# EAGLE board TSC-proiect2 (EAGLE 9.7.0)
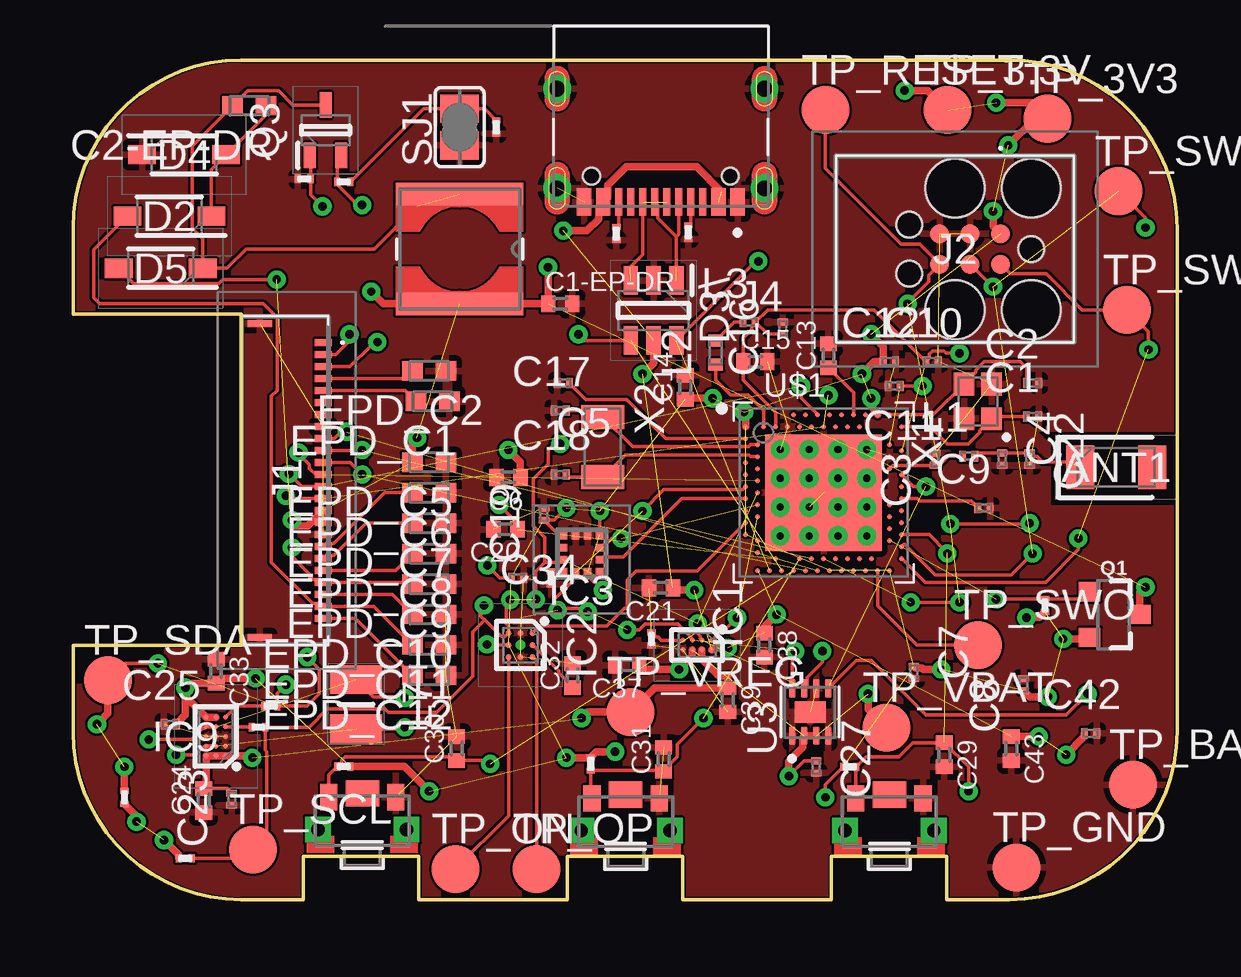
[diagram p0: board, top side]
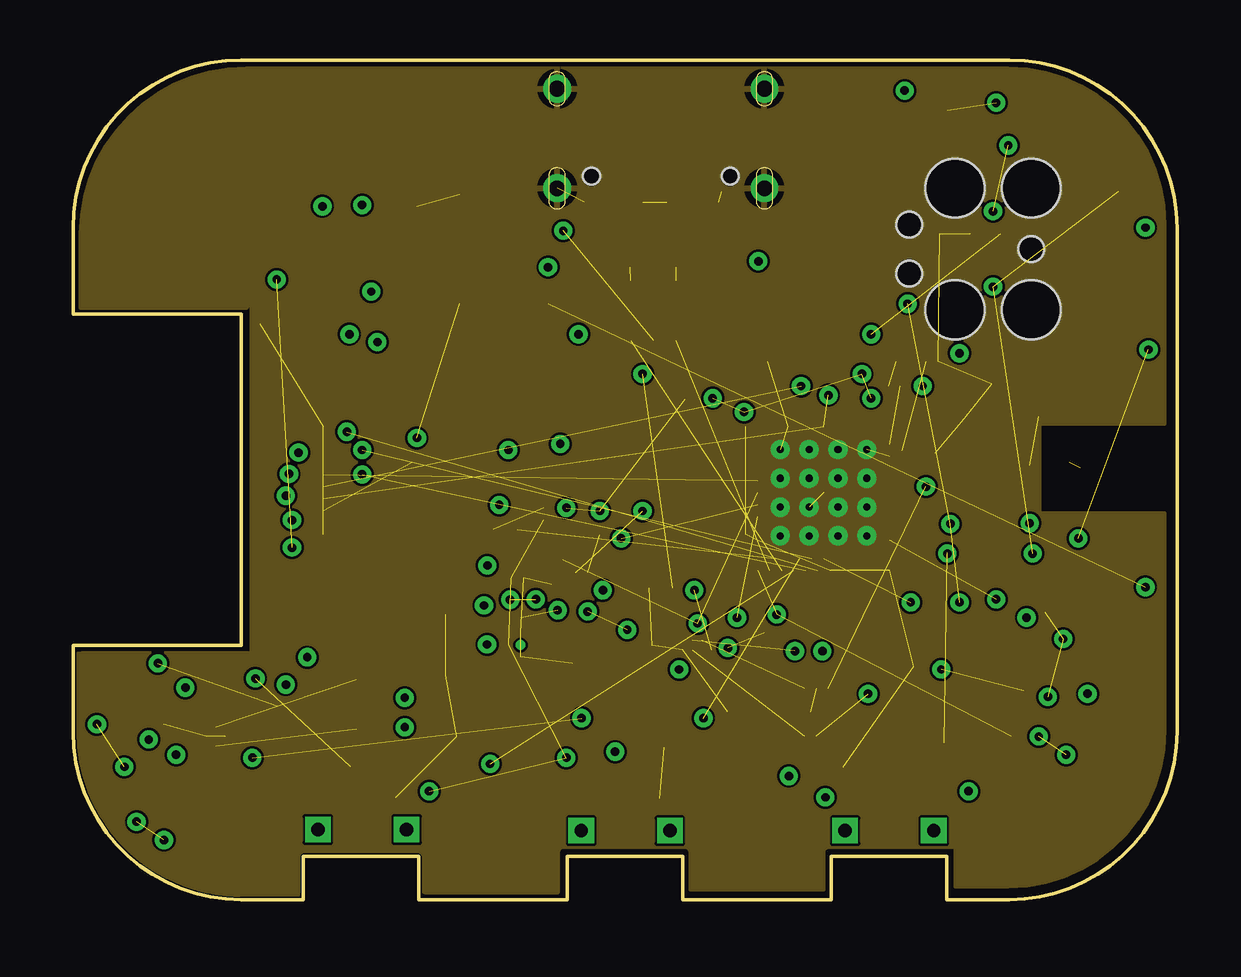
[diagram p1: board, inner layer Route2]
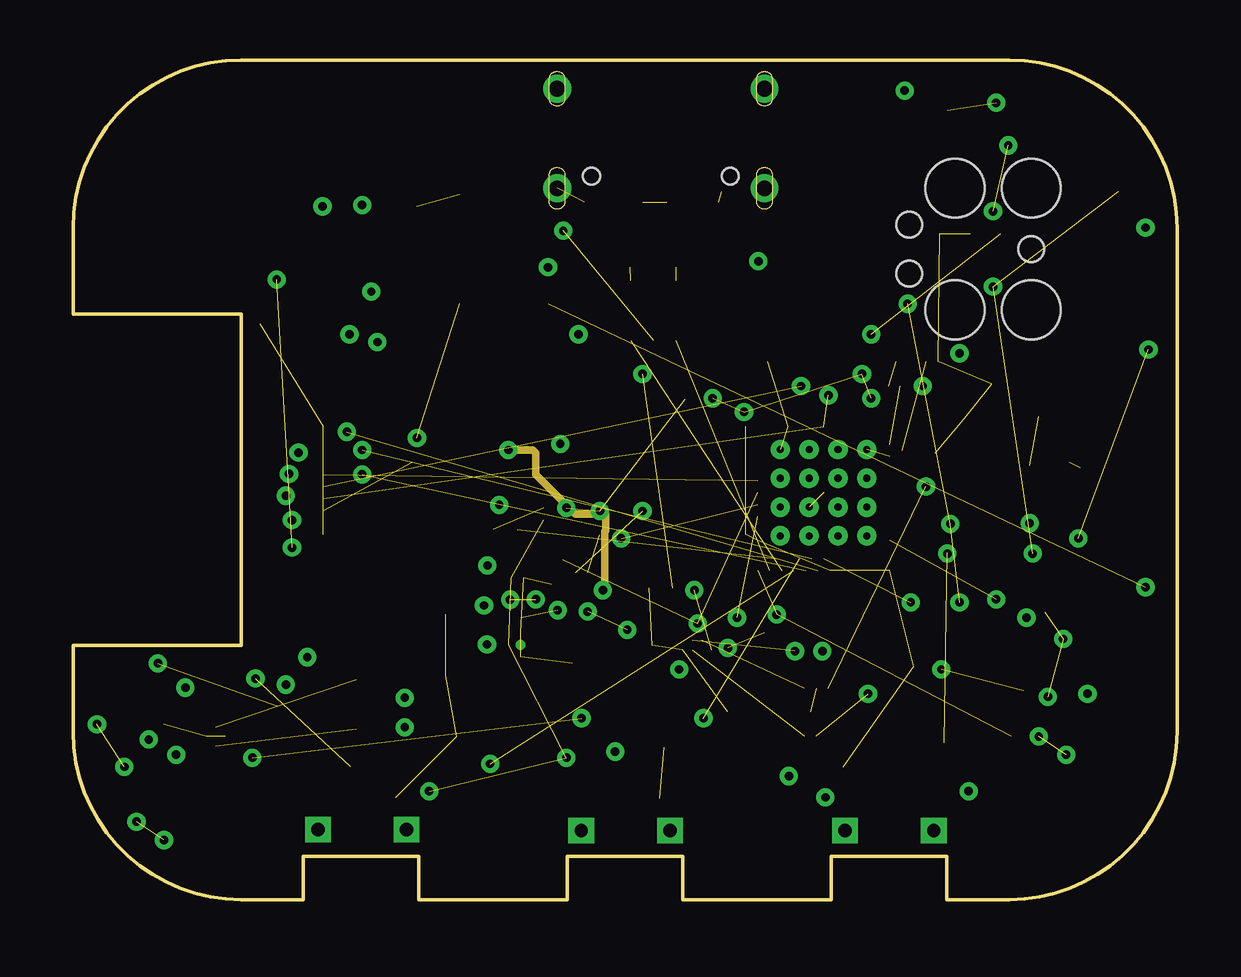
[diagram p2: board, inner layer Route15]
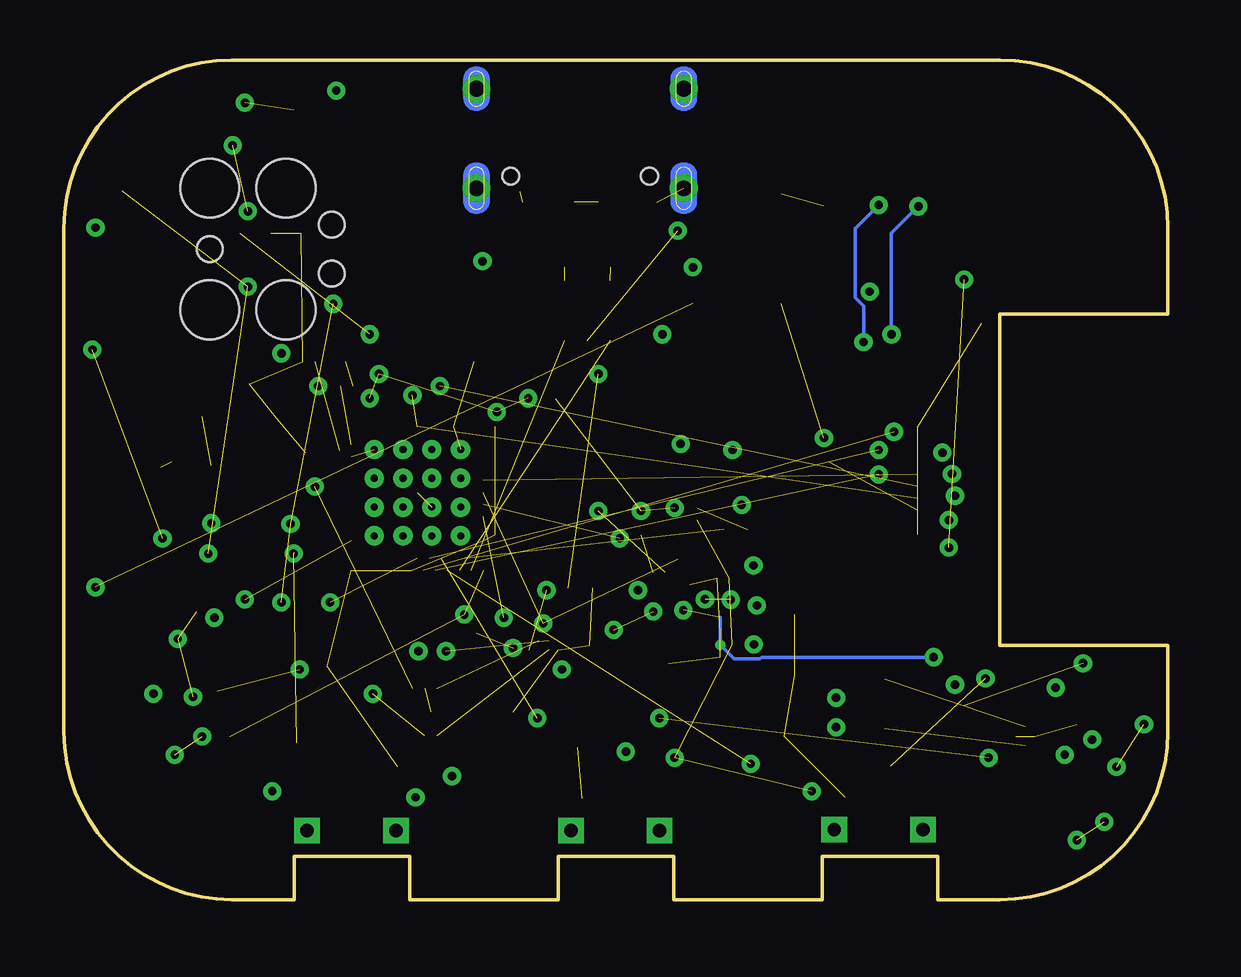
[diagram p3: board, bottom side, seen from below]

Size 46 x 35 mm. Coordinates in mm from the lower left corner, seen from the top.
Outline: 39,0 36.4,0 36.4,1.8 31.6,1.8 31.6,0 25.4,0 25.4,1.8 20.6,1.8 20.6,0 14.4,0 14.4,1.8 9.6,1.8 9.6,0 7,0 arc-90 0,7 0,10.6 7,10.6 7,24.4 0,24.4 0,28 arc-90 7,35 39,35 arc-90 46,28 46,7 arc-90 39,0
Copper layers (1+2*15+16): Top 0.035mm / dielectric 1.5mm / Route2 0.035mm / dielectric 0.15mm / Route15 0.035mm / dielectric 0.2mm / Bottom 0.035mm
Design rules "Fusion Electronics Design Rules *": minimum track width 4mil, minimum drill 0.29971875mm, track to track 4mil, track to pad 4mil, pad to pad 4mil, via to via 4mil, smd to smd 4mil, copper to edge 2mil, drill to drill 6mil, minimum pad ring 10mil, minimum via ring 8mil, stop-mask expansion 4mil, vias tented up to drill 9999mil, thermal gap 10mil

## Footprints (pad centres in the part's own frame; a part is rotated, then mirrored left to right if it is on the bottom)
2450AT18B100E_ANTC3216X140N = smd 1.15 x 1.8: 1 -1.5,0; 2 1.5,0
NORDIC_NRF_3_RESC0201_L = smd 0.28 x 0.43: 1 -0.255,0; 2 0.255,0
PERFECT_0402_0402 = smd 0.6 x 0.7: 1 -0.5,0; 2 0.5,0
NORDIC_NRF_3_RESC0603_L = smd 0.85 x 0.8: 1 -0.7,0; 2 0.7,0
ESP32_C6_LIBRARY_5_SOD3716X135N = smd 1.15 x 0.8: 1 -1.75,0; 2 1.75,0
ESP32_C6_LIBRARY_3_SOT95P280X145-6N = smd 1.2 x 0.6: 1 -1.25,0.95; 2 -1.25,0; 3 -1.25,-0.95; 4 1.25,-0.95; 5 1.25,0; 6 1.25,0.95
BQ25180YBGR_BGA8C40P2X4_100X155X50 = smd 0.2 x 0.2: A1 -0.2,0.6; A2 0.2,0.6; B1 -0.2,0.2; B2 0.2,0.2; C1 -0.2,-0.2; C2 0.2,-0.2; D1 -0.2,-0.6; D2 0.2,-0.6
DRV2605YZFR_BGA9C50P3X3_144X144X62 = smd 0.25 x 0.25: A1 -0.5,0.5; A2 0,0.5; A3 0.5,0.5; B1 -0.5,0; B2 0,0; B3 0.5,0; C1 -0.5,-0.5; C2 0,-0.5; C3 0.5,-0.5
BMA423_BMA423 = smd 0.3 x 0.35: 1 -0.75,-0.775; 2 -0.25,-0.775; 3 0.25,-0.775; 4 0.75,-0.775; 7 0.75,0.775; 8 0.25,0.775; 9 -0.25,0.775; 10 -0.75,0.775 | smd 0.35 x 0.3: 5 0.775,-0.25; 6 0.775,0.25; 11 -0.775,0.25; 12 -0.775,-0.25
RT6160AWSC_BGA15C40P3X5_140X230X60 = smd 0.216 x 0.216: A1 -0.4,0.8; A2 0,0.8; A3 0.4,0.8; B1 -0.4,0.4; B2 0,0.4; B3 0.4,0.4; C1 -0.4,0; C2 0,0; C3 0.4,0; D1 -0.4,-0.4; D2 0,-0.4; D3 0.4,-0.4; E1 -0.4,-0.8; E2 0,-0.8; E3 0.4,-0.8
503480-2400_5034802400 = smd 0.3 x 0.7: 1 -5.75,1.525; 2 -5.25,1.525; 3 -4.75,1.525; 4 -4.25,1.525; 5 -3.75,1.525; 6 -3.25,1.525; 7 -2.75,1.525; 8 -2.25,1.525; 9 -1.75,1.525; 10 -1.25,1.525; 11 -0.75,1.525; 12 -0.25,1.525; 13 0.25,1.525; 14 0.75,1.525; 15 1.25,1.525; 16 1.75,1.525; 17 2.25,1.525; 18 2.75,1.525; 19 3.25,1.525; 20 3.75,1.525; 21 4.25,1.525; 22 4.75,1.525; 23 5.25,1.525; 24 5.75,1.525 | smd 0.3 x 1: MP1 -6.54,-1.125; MP2 6.54,-1.125
TC2030-IDC_TC2030IDC = smd 0.783 x 0.783: 1 -0.953,-0.635; 2 -0.953,0.635; 3 0.317,-0.635; 4 0.317,0.635; 5 1.588,-0.635; 6 1.588,0.635 | hole 2.451: -2.223,-2.54; -2.223,2.54; 0.952,-2.54; 0.952,2.54 | hole 1.067: -2.223,0; 2.857,-1.016; 2.857,1.016
KH-TYPE-C-16P_KINGHELM_KH-TYPE-C-16P = smd 0.6 x 1.15: A1_B12 -3.2,4.725; A4_B9 -2.4,4.725; A9_B4 2.4,4.725; A12_B1 3.2,4.725 | smd 0.3 x 1.15: A5 -1.25,4.725; A6 -0.25,4.725; A7 0.25,4.725; A8 1.25,4.725; B5 1.75,4.725; B6 0.75,4.725; B7 -0.75,4.725; B8 -1.75,4.725 | drill 0.65 pad 1.05: SH1 -4.32,0; SH2 4.32,0; SH3 -4.32,4.15; SH4 4.32,4.15 | hole 0.7: -2.89,3.65; 2.89,3.65
NORDIC_NRF_2_RESC0201_L = smd 0.28 x 0.43: 1 -0.255,0; 2 0.255,0
NORDIC_NRF_2_RESC0402_L = smd 0.5 x 0.6: 1 -0.5,0; 2 0.5,0
ESP32_C6_LIBRARY_2_IND_4828-WE-TPC_WRE = smd 0.9 x 5.3: 1 -2.286,0; 2 2.286,0
MLP2016SR47MT0S1_INDC2016X100N = smd 1.2 x 2.2: 1 -1.028,0; 2 1.028,0
ESP32_C6_LIBRARY_4_ESP32_C6_LIBRARY_4_ESP32_C6_LIBRARY_4_ESP32_C6_LIBRARY_4_ESP32_WROVER_SPARKFUN-DISCRETESEMI_SOT23-3 = smd 0.8 x 0.9: 1 -0.95,-1; 2 0.95,-1; 3 0,1.1
ESP32_C6_LIBRARY_6_SOT65P210X110-3N = smd 1.05 x 0.5: 1 -1.05,0.65; 2 -1.05,-0.65; 3 1.05,0
CPF0201D7K68C1_0201 = smd 0.35 x 0.25: 1 0,0.275; 2 0,-0.275
ESP32_C6_LIBRARY_7_JUMPER_SJ = smd 1.168 x 1.6: 1 -0.762,0; 2 0.762,0
2025-10-22_07-23-44_LIBRARY_SW_EVP-AKE31A_PAN = smd 0.711 x 1.092: 1 -1.4,-0.972; 2 1.4,-0.972 | drill 0.559 pad 0.914 square: 3 -1.848,0.381; 4 1.848,0.381 | smd 1.397 x 1.092: 5 0,-1.124
HECTOR_WATCH_1_TP20R = smd 2 x 2: TP 0,0
ESP32_C6_LIBRARY_SON50P200X200X80-9N = smd 0.76 x 0.27: 1 -0.985,0.75; 2 -0.985,0.25; 3 -0.985,-0.25; 4 -0.985,-0.75; 5 0.985,-0.75; 6 0.985,-0.25; 7 0.985,0.25; 8 0.985,0.75 | smd 0.9 x 1.3: 9 0,0
NORDIC_NRF_4_AQFN50P700X700X85_HS-74N = smd 4.85 x 4.85: P$74 0,0 | drill 0.3 pad 0.6: P$75 -1.8,1.8; P$76 -0.6,1.8; P$77 0.6,1.8; P$78 1.8,1.8; P$79 -1.8,0.6; P$80 -0.6,0.6; P$81 0.6,0.6; P$82 1.8,0.6; P$83 -1.8,-0.6; P$84 -0.6,-0.6; P$85 0.6,-0.6; P$86 1.8,-0.6; P$87 -1.8,-1.8; P$88 -0.6,-1.8; P$89 0.6,-1.8; P$90 1.8,-1.8 | smd 0.2 x 0.2: P$A8 -1.25,3.25; P$A10 -0.75,3.25; P$A12 -0.25,3.25; P$A14 0.25,3.25; P$A16 0.75,3.25; P$A18 1.25,3.25; P$A20 1.75,3.25; P$A22 2.25,3.25; P$A23 2.75,3.25; P$AA24 3.25,-2.25; P$AB2 -2.75,-2.5; P$AC5 -2,-2.75; P$AC9 -1,-2.75; P$AC11 -0.5,-2.75; P$AC13 0,-2.75; P$AC15 0.5,-2.75; P$AC17 1,-2.75; P$AC19 1.5,-2.75; P$AC21 2,-2.75; P$AC24 3.25,-2.75; P$AD2 -2.75,-3.25; P$AD4 -2.25,-3.25; P$AD6 -1.75,-3.25; P$AD8 -1.25,-3.25; P$AD10 -0.75,-3.25; P$AD12 -0.25,-3.25; P$AD14 0.25,-3.25; P$AD16 0.75,-3.25; P$AD18 1.25,-3.25; P$AD20 1.75,-3.25; P$AD22 2.25,-3.25; P$AD23 2.75,-3.25; P$B1 -3.25,2.75; P$B3 -2.5,2.75; P$B5 -2,2.75; P$B7 -1.5,2.75; P$B9 -1,2.75; P$B11 -0.5,2.75; P$B13 0,2.75; P$B15 0.5,2.75; P$B17 1,2.75; P$B19 1.5,2.75; P$B24 3.25,2.75; P$C1 -3.25,2.25; P$D2 -2.75,2; P$D23 2.75,2; P$E24 3.25,1.75; P$F2 -2.75,1.5; P$F23 2.75,1.5; P$G1 -3.25,1.25; P$H2 -2.75,1; P$H23 2.75,1; P$J1 -3.25,0.75; P$J24 3.25,0.75; P$K2 -2.75,0.5; P$L1 -3.25,0.25; P$L24 3.25,0.25; P$M2 -2.75,0; P$N1 -3.25,-0.25; P$N24 3.25,-0.25; P$P2 -2.75,-0.5; P$P23 2.75,-0.5; P$R1 -3.25,-0.75; P$R24 3.25,-0.75; P$T2 -2.75,-1; P$T23 2.75,-1; P$U1 -3.25,-1.25; P$U24 3.25,-1.25; P$V23 2.75,-1.5; P$W1 -3.25,-1.75; P$W24 3.25,-1.75; P$Y2 -2.75,-2; P$Y23 2.75,-2
NORDIC_NRF_BT-XTAL_2016_N = smd 0.95 x 0.85: 1 -0.725,-0.575; 2 0.725,-0.575; 3 0.725,0.575; 4 -0.725,0.575
NORDIC_NRF_1_XTAL_3215_N = smd 1 x 1.8: 1 -1.25,0; 2 1.25,0

## Placement (x,y rotation side)
ANT1  2450AT18B100E_2450AT18B100E  [2450AT18B100E_ANTC3216X140N]  43.47,18.02 0 top
C1  12p  [NORDIC_NRF_3_RESC0201_L]  39.99,20.13 0 top
C1-EP-DR  10u  [PERFECT_0402_0402]  20.3,24.83 0 top
C2  12p  [NORDIC_NRF_3_RESC0201_L]  39.99,21.53 0 top
C2-EP-DR  4.7u/25V  [NORDIC_NRF_3_RESC0603_L]  7.35,33.09 180 top
C3  1p  [NORDIC_NRF_3_RESC0201_L]  35.92,18.36 90 top
C4  1p  [NORDIC_NRF_3_RESC0201_L]  38.72,18.36 270 top
C5  100n  [NORDIC_NRF_3_RESC0201_L]  20.43,21.53 180 top
C6  4.7u  [PERFECT_0402_0402]  18.14,17.59 180 top
C7  100n  [NORDIC_NRF_3_RESC0201_L]  35.03,9.47 270 top
C8  100n  [NORDIC_NRF_3_RESC0201_L]  39.6,8.96 90 top
C9  820p (N.C.)  [NORDIC_NRF_3_RESC0201_L]  37.95,16.33 0 top
C10  N.C.  [NORDIC_NRF_3_RESC0201_L]  35.8,22.42 0 top
C11  100p  [NORDIC_NRF_3_RESC0201_L]  34.22,21.41 180 top
C12  100n  [NORDIC_NRF_3_RESC0201_L]  34.02,22.42 0 top
C13  N.C.  [PERFECT_0402_0402]  31.48,22.67 90 top
C14  4.7u  [PERFECT_0402_0402]  25.51,21.36 90 top
C15  1u  [PERFECT_0402_0402]  28.43,22.42 0 top
C16  47n  [NORDIC_NRF_3_RESC0201_L]  29.57,23.82 90 top
C17  12p  [NORDIC_NRF_3_RESC0201_L]  20.3,20.39 0 top
C18  12p  [NORDIC_NRF_3_RESC0201_L]  20.3,17.72 0 top
C19  100n  [NORDIC_NRF_3_RESC0201_L]  19.62,16.07 90 top
C20  4.7u  [PERFECT_0402_0402]  18.02,15.44 180 top
C21  4.7u  [PERFECT_0402_0402]  24.49,12.99 180 top
C22  N.C.  [NORDIC_NRF_3_RESC0201_L]  39.86,18.36 270 top
C23  0.1u  [NORDIC_NRF_3_RESC0201_L]  6.61,4.19 90 top
C24  10u  [PERFECT_0402_0402]  5.44,4.13 90 top
C25  22u  [NORDIC_NRF_3_RESC0201_L]  4.04,7.31 0 top
C27  0.1u  [NORDIC_NRF_3_RESC0201_L]  30.97,5.53 270 top
C29  1u  [PERFECT_0402_0402]  36.3,6.04 270 top
C30  1u  [PERFECT_0402_0402]  15.98,6.29 90 top
C31  1u  [PERFECT_0402_0402]  24.61,5.84 90 top
C32  1u  [PERFECT_0402_0402]  20.81,9.34 90 top
C33  22u  [PERFECT_0402_0402]  5.96,9.52 270 top
C34  0.1u  [NORDIC_NRF_3_RESC0201_L]  18.52,13.4 0 top
C37  1u  [PERFECT_0402_0402]  23.09,9.77 180 top
C38  1u  [PERFECT_0402_0402]  28.81,10.61 270 top
C39  10u  [PERFECT_0402_0402]  27.29,8.32 270 top
C42  0.1u  [NORDIC_NRF_3_RESC0201_L]  42.4,6.93 0 top
C43  4.7u  [PERFECT_0402_0402]  39.1,6.29 270 top
D2  MBR0530  [ESP32_C6_LIBRARY_5_SOD3716X135N]  4.01,28.49 180 top
D3\  ESP32_C6_LIBRARY_3_USBLC6-2SC6Y  [ESP32_C6_LIBRARY_3_SOT95P280X145-6N]  24.19,24.56 270 top
D4  MBR0530  [ESP32_C6_LIBRARY_5_SOD3716X135N]  4.63,31.05 0 top
D5  MBR0530  [ESP32_C6_LIBRARY_5_SOD3716X135N]  3.66,26.32 180 top
EPD_C1  1u/50V  [NORDIC_NRF_3_RESC0603_L]  14.99,20.77 180 top
EPD_C2  1u/50V  [NORDIC_NRF_3_RESC0603_L]  14.84,22.04 180 top
EPD_C5  0.1u/50V  [NORDIC_NRF_3_RESC0603_L]  14.84,18.23 180 top
EPD_C6  1u/50V  [NORDIC_NRF_3_RESC0603_L]  14.84,16.96 180 top
EPD_C7  1u/50V  [NORDIC_NRF_3_RESC0603_L]  14.84,15.69 180 top
EPD_C8  1u/50V  [NORDIC_NRF_3_RESC0603_L]  14.84,14.42 180 top
EPD_C9  1u/50V  [NORDIC_NRF_3_RESC0603_L]  14.84,13.15 180 top
EPD_C10  1u/50V  [NORDIC_NRF_3_RESC0603_L]  14.84,11.88 180 top
EPD_C11  1u/50V  [NORDIC_NRF_3_RESC0603_L]  14.84,10.61 180 top
EPD_C12  1u/50V  [NORDIC_NRF_3_RESC0603_L]  14.84,9.34 180 top
IC1  BQ25180YBGR_BQ25180YBGR  [BQ25180YBGR_BGA8C40P2X4_100X155X50]  26.01,10.61 270 top
IC2  DRV2605YZFR  [DRV2605YZFR_BGA9C50P3X3_144X144X62]  18.65,10.61 270 top
IC3  BMA423_BMA423  [BMA423_BMA423]  21.19,14.42 0 top
IC9  RT6160AWSC_RT6160AWSC  [RT6160AWSC_BGA15C40P3X5_140X230X60]  5.95,6.8 180 top
J1  503480-2400_503480-2400  [503480-2400_5034802400]  8.9,17.47 270 top
J2  TC2030-IDC_TC2030-IDC  [TC2030-IDC_TC2030IDC]  37.7,27.12 180 top
J4  KH-TYPE-C-16P_KH-TYPE-C-16P  [KH-TYPE-C-16P_KINGHELM_KH-TYPE-C-16P]  24.49,33.8 180 top
L1  3.9n  [NORDIC_NRF_2_RESC0201_L]  37.32,18.48 0 top
L2  10u  [NORDIC_NRF_2_RESC0402_L]  26.78,22.8 90 top
L3  15n  [NORDIC_NRF_2_RESC0201_L]  28.17,24.07 0 top
L5  68u  [ESP32_C6_LIBRARY_2_IND_4828-WE-TPC_WRE]  16.11,27.12 270 top
L7  FTC252012SR47MBCA  [MLP2016SR47MT0S1_INDC2016X100N]  11.79,8.14 90 top
Q1  20V/4.2A/52mΩ/1.4W  [ESP32_C6_LIBRARY_4_ESP32_C6_LIBRARY_4_ESP32_C6_LIBRARY_4_ESP32_C6_LIBRARY_4_ESP32_WROVER_SPARKFUN-DISCRETESEMI_SOT23-3]  43.36,11.88 270 top
Q3  ESP32_C6_LIBRARY_6_SI1308EDL-T1-GE3  [ESP32_C6_LIBRARY_6_SOT65P210X110-3N]  10.52,32.07 90 top
R1_EP_DR  0.47  [CPF0201D7K68C1_0201]  11.28,29.91 270 top
R1_TYPE_SEL  2.2  [CPF0201D7K68C1_0201]  17.63,32.2 180 top
R1_USB  5K1  [CPF0201D7K68C1_0201]  25.63,27.82 180 top
R2  0  [CPF0201D7K68C1_0201]  8.24,8.07 270 top
R2_EP_DR  10K  [CPF0201D7K68C1_0201]  9.63,30.04 90 top
R2_USB  5K1  [CPF0201D7K68C1_0201]  22.64,27.75 0 top
R3  0  [CPF0201D7K68C1_0201]  19.92,13.4 180 top
R4  0  [CPF0201D7K68C1_0201]  7.73,7.18 270 top
R5  10K  [CPF0201D7K68C1_0201]  11.28,5.55 90 top
R7  10K  [CPF0201D7K68C1_0201]  32.37,5.53 270 top
R8  10K  [CPF0201D7K68C1_0201]  21.57,5.66 180 top
R9  10k  [CPF0201D7K68C1_0201]  24.11,10.86 180 top
R17  3K3  [CPF0201D7K68C1_0201]  4.68,1.72 90 top
R18  3K3  [CPF0201D7K68C1_0201]  2.14,4.26 180 top
R_PWR_EPD  10K  [CPF0201D7K68C1_0201]  40.49,12.26 0 top
SJ1  [ESP32_C6_LIBRARY_7_JUMPER_SJ]  16.11,32.2 90 top
SW_DN  2025-10-22_07-23-44_LIBRARY_EVP-AKE31ASW_EVP-AKE31A_PAN  [2025-10-22_07-23-44_LIBRARY_SW_EVP-AKE31A_PAN]  34.02,3.25 180 top
SW_ENT  2025-10-22_07-23-44_LIBRARY_EVP-AKE31ASW_EVP-AKE31A_PAN  [2025-10-22_07-23-44_LIBRARY_SW_EVP-AKE31A_PAN]  23.02,3.25 180 top
SW_UP  2025-10-22_07-23-44_LIBRARY_EVP-AKE31ASW_EVP-AKE31A_PAN  [2025-10-22_07-23-44_LIBRARY_SW_EVP-AKE31A_PAN]  12.05,3.3 180 top
TP_3.3V  HECTOR_WATCH_1_TPTP20R  [HECTOR_WATCH_1_TP20R]  36.43,32.91 0 top
TP_3V3  HECTOR_WATCH_1_TPTP20R  [HECTOR_WATCH_1_TP20R]  40.61,32.55 0 top
TP_BAT_GND  HECTOR_WATCH_1_TPTP20R  [HECTOR_WATCH_1_TP20R]  44.16,4.79 0 top
TP_GND  HECTOR_WATCH_1_TPTP20R  [HECTOR_WATCH_1_TP20R]  39.3,1.34 0 top
TP_ON  HECTOR_WATCH_1_TPTP20R  [HECTOR_WATCH_1_TP20R]  15.93,1.28 0 top
TP_OP  HECTOR_WATCH_1_TPTP20R  [HECTOR_WATCH_1_TP20R]  19.32,1.28 0 top
TP_RESET  HECTOR_WATCH_1_TPTP20R  [HECTOR_WATCH_1_TP20R]  31.35,32.91 0 top
TP_SCL  HECTOR_WATCH_1_TPTP20R  [HECTOR_WATCH_1_TP20R]  7.51,2.09 0 top
TP_SDA  HECTOR_WATCH_1_TPTP20R  [HECTOR_WATCH_1_TP20R]  1.46,9.14 0 top
TP_SWDCLK  HECTOR_WATCH_1_TPTP20R  [HECTOR_WATCH_1_TP20R]  43.57,29.53 0 top
TP_SWDIO  HECTOR_WATCH_1_TPTP20R  [HECTOR_WATCH_1_TP20R]  43.91,24.58 0 top
TP_SWO  HECTOR_WATCH_1_TPTP20R  [HECTOR_WATCH_1_TP20R]  37.7,10.61 0 top
TP_VBAT  HECTOR_WATCH_1_TPTP20R  [HECTOR_WATCH_1_TP20R]  33.89,7.17 0 top
TP_VREG  HECTOR_WATCH_1_TPTP20R  [HECTOR_WATCH_1_TP20R]  23.22,7.82 0 top
U3  ESP32_C6_LIBRARY_MAX17048G+T10  [ESP32_C6_LIBRARY_SON50P200X200X80-9N]  30.71,7.82 90 top
U$1  NORDIC_NRF_4_NRF52840_QF  [NORDIC_NRF_4_AQFN50P700X700X85_HS-74N]  31.27,16.96 0 top
X1  32M  [NORDIC_NRF_BT-XTAL_2016_N]  37.7,20.77 90 top
X2  32.768k  [NORDIC_NRF_1_XTAL_3215_N]  22.08,18.86 270 top

## Library data of the parts
ANT1 = InkTime_v5; ARROW_PART_NUMBER: 2450AT18B100E; ARROW_PRICE-STOCK: https://www.arrow.com/en/products/2450at18b100e/johanson-dielectrics?utm_currency=USD&region=nac; DESCRIPTION: Antennas 2.45GHz ANTENNA; HEIGHT: 1.4mm; MANUFACTURER_NAME: JOHANSON TECHNOLOGY; MANUFACTURER_PART_NUMBER: 2450AT18B100E; MOUSER_PART_NUMBER: 609-2450AT18B100E; MOUSER_PRICE-STOCK: https://www.mouser.co.uk/ProductDetail/Johanson-Technology/2450AT18B100E?qs=yCnrNFeXz%252Bh5MFsFIXGZGA%3D%3D
C1 C1-EP-DR C2 C2-EP-DR C3-C25 C27 C29-C34 C37-C39 C42 C43 EPD_C1 EPD_C2 EPD_C5-EPD_C12 L1-L3 R1_EP_DR R1_TYPE_SEL R1_USB R2 R2_EP_DR R2_USB R3-R5 R7-R9 R17 R18 R_PWR_EPD SJ1 TP_3.3V TP_3V3 TP_BAT_GND TP_GND TP_ON TP_OP TP_RESET TP_SCL TP_SDA TP_SWDCLK TP_SWDIO TP_SWO TP_VBAT TP_VREG U$1 X1 X2 = InkTime_v5
D2 D4 D5 = InkTime_v5; AVAILABILITY: In Stock; CHECK_PRICES: https://www.snapeda.com/parts/MBR0530/Onsemi/view-part/?ref=eda; DESCRIPTION: Diode Schottky 30 V 500mA Surface Mount SOD-123; MF: ON Semiconductor; MP: MBR0530; PACKAGE: SOD-123-2 ON Semiconductor; PRICE: None; PURCHASE-URL: https://www.snapeda.com/api/url_track_click_mouser/?unipart_id=179458&manufacturer=ON Semiconductor&part_name=MBR0530&search_term=None; SNAPEDA_LINK: https://www.snapeda.com/parts/MBR0530/Onsemi/view-part/?ref=snap
D3\ = InkTime_v5; AVAILABILITY: In Stock; CHECK_PRICES: https://www.snapeda.com/parts/USBLC6-2SC6Y/STMicroelectronics/view-part/?ref=eda; DESCRIPTION: 17V Clamp 5A (8/20µs) Ipp Tvs Diode Surface Mount SOT-23-6; MF: STMicroelectronics; MP: USBLC6-2SC6Y; PACKAGE: SOT-23-6 STMicroelectronics; PRICE: None; SNAPEDA_LINK: https://www.snapeda.com/parts/USBLC6-2SC6Y/STMicroelectronics/view-part/?ref=snap
IC1 = InkTime_v5; ARROW_PART_NUMBER: BQ25180YBGR; ARROW_PRICE-STOCK: https://www.arrow.com/en/products/bq25180ybgr/texas-instruments?utm_currency=USD&region=nac; DESCRIPTION: Charger IC Lithium Ion/Polymer, Lithium Iron Phosphate 8-DSBGA (1.6x1.1); HEIGHT: 0.5mm; MANUFACTURER_NAME: Texas Instruments; MANUFACTURER_PART_NUMBER: BQ25180YBGR; MOUSER_PART_NUMBER: 595-BQ25180YBGR; MOUSER_PRICE-STOCK: https://www.mouser.co.uk/ProductDetail/Texas-Instruments/BQ25180YBGR?qs=doiCPypUmgEWjAK%252BJAX6Tw%3D%3D
IC2 = InkTime_v5; ARROW_PART_NUMBER: DRV2605YZFR; ARROW_PRICE-STOCK: https://www.arrow.com/en/products/drv2605yzfr/texas-instruments?region=nac; DESCRIPTION: Haptic Driver for ERM/LRA with Built-In Library and Smart Loop Architecture; HEIGHT: 0.625mm; MANUFACTURER_NAME: Texas Instruments; MANUFACTURER_PART_NUMBER: DRV2605YZFR
IC3 = InkTime_v5; ARROW_PART_NUMBER: BMA423; ARROW_PRICE-STOCK: https://www.arrow.com/en/products/bma423/bosch; DESCRIPTION: Accelerometers Triaxial low-g 12bit Acceleration Sensor; HEIGHT: 1mm; MANUFACTURER_NAME: BOSCH; MANUFACTURER_PART_NUMBER: BMA423; MOUSER_PART_NUMBER: 262-BMA423; MOUSER_PRICE-STOCK: https://www.mouser.co.uk/ProductDetail/Bosch-Sensortec/BMA423?qs=HXFqYaX1Q2xC%252BSgeGoX3mg%3D%3D
IC9 = InkTime_v5; DESCRIPTION: Buck-Boost Regulator Positive Output Step-Up/Step-Down I2C DC-DC Controller IC 15-WL-CSP (BSC) (1.4x2.3); HEIGHT: 0.6mm; MANUFACTURER_NAME: RICHTEK; MANUFACTURER_PART_NUMBER: RT6160AWSC; MOUSER_PART_NUMBER: 835-RT6160AWSC; MOUSER_PRICE-STOCK: https://www.mouser.co.uk/ProductDetail/Richtek/RT6160AWSC?qs=amGC7iS6iy%2FLd9PSoixZXQ%3D%3D
J1 = InkTime_v5; DESCRIPTION: FFC & FPC Connectors 0.5mm FPC RA SMT Dual Contact 24Ckt; HEIGHT: 1.87mm; MANUFACTURER_NAME: Molex; MANUFACTURER_PART_NUMBER: 503480-2400; MOUSER_PART_NUMBER: 538-503480-2400; MOUSER_PRICE-STOCK: https://www.mouser.co.uk/ProductDetail/Molex/503480-2400?qs=OAhjpuo3Vu7efIoxFh9AOw%3D%3D
J2 = InkTime_v5; DESCRIPTION: CABLE ADAPTER 6 POS; HEIGHT: 19mm; MANUFACTURER_NAME: Tag Connect; MANUFACTURER_PART_NUMBER: TC2030-IDC
J4 = InkTime_v5; AVAILABILITY: Not in stock; CHECK_PRICES: https://www.snapeda.com/parts/KH-TYPE-C-16P/Kinghelm/view-part/?ref=eda; MF: kinghelm; MP: KH-TYPE-C-16P; PACKAGE: None; PRICE: None; SNAPEDA_LINK: https://www.snapeda.com/parts/KH-TYPE-C-16P/Kinghelm/view-part/?ref=snap
L5 = InkTime_v5; COPYRIGHT: Copyright (C) 2024 Ultra Librarian. All rights reserved.; MANUFACTURER_PART_NUMBER: 744043680; MFR_NAME: Wurth Electronics
L7 = InkTime_v5; DESCRIPTION: SMD / SMT Inductors (Coils), L=0.47?H, L x W x T :; HEIGHT: 1mm; JLCPCB: https://jlcpcb.com/partdetail/6763488-FTC252012SR47MBCA/C5832368; MANUFACTURER_NAME: TDK; MANUFACTURER_PART_NUMBER: FTC252012SR47MBCA
Q1 = InkTime_v5; PROD_ID: TRAN-14388
Q3 = InkTime_v5; AVAILABILITY: In Stock; CHECK_PRICES: https://www.snapeda.com/parts/SI1308EDL-T1-GE3/Vishay+Siliconix/view-part/?ref=eda; DESCRIPTION: Si1308EDL-T1-GE3 N-channel MOSFET Transistor, 1.5 A, 30 V, 3-Pin SC-70 | Siliconix / Vishay SI1308EDL-T1-GE3; MF: Vishay Siliconix; MP: SI1308EDL-T1-GE3; PACKAGE: SOT-323 Vishay Semiconductor; PRICE: None; PURCHASE-URL: https://www.snapeda.com/api/url_track_click_mouser/?unipart_id=274603&manufacturer=Vishay Siliconix&part_name=SI1308EDL-T1-GE3&search_term=None; SNAPEDA_LINK: https://www.snapeda.com/parts/SI1308EDL-T1-GE3/Vishay+Siliconix/view-part/?ref=snap
SW_DN SW_ENT SW_UP = InkTime_v5(2); COPYRIGHT: Copyright (C) 2025 Ultra Librarian. All rights reserved.; DIGI-KEY_PART_NUMBER_1: P123437TR-ND; DIGI-KEY_PART_NUMBER_2: P123437CT-ND; DIGI-KEY_PART_NUMBER_3: P123437DKR-ND; MANUFACTURER_NAME: Panasonic; MANUFACTURER_PART_NUMBER: EVP-AKE31A
U3 = InkTime_v5; AVAILABILITY: In Stock; CHECK_PRICES: https://www.snapeda.com/parts/MAX17048G+T10/Analog+Devices/view-part/?ref=eda; DESCRIPTION: 3µA 1-Cell/2-Cell Fuel Gauge with ModelGauge; MF: Analog Devices; MP: MAX17048G+T10; PACKAGE: TDFN-8 Maxim; PRICE: None; PURCHASE-URL: https://www.snapeda.com/api/url_track_click_mouser/?unipart_id=329239&manufacturer=Analog Devices&part_name=MAX17048G+T10&search_term=None; SNAPEDA_LINK: https://www.snapeda.com/parts/MAX17048G+T10/Analog+Devices/view-part/?ref=snap

## Nets
3V3 [POWER]: C6.1 C7.1 C8.1 C12.1 C14.1 C19.1 C25.2 C33.2 C34.1 IC2.C2 IC3.3 IC3.7 IC3.10 IC9.E2 IC9.E3 J2.1 Q1.2 R5.2 R7.2 R8.2 R_PWR_EPD.2 TP_3.3V.TP TP_3V3.TP U$1.P$A22 U$1.P$AD14 U$1.P$AD23 U$1.P$B1 U$1.P$W1 U$1.P$Y2
ALERT: U3.5 U$1.P$J24
D+: D3\.4 U$1.P$AD6
D-: D3\.6 U$1.P$AD4
DEC1: C5.1 U$1.P$C1
DEC3: C11.1 U$1.P$D23
DEC4_6: C10.1 C15.1 C16.1 L3.2 U$1.P$B5 U$1.P$E24
DN: D3\.1 J4.A7 J4.B7
DP: D3\.3 J4.A6 J4.B6
EPD_3V3: C1-EP-DR.1 EPD_C5.2 J1.15 J1.16 L5.2 Q1.3
EPD_BUSY: J1.9 U$1.P$AD12
EPD_CS: J1.12 U$1.P$K2
EPD_DC: J1.11 U$1.P$AD10
EPD_RST: J1.10 U$1.P$AC11
GDR: J1.2 Q3.1 R2_EP_DR.2
GND [POWER]: C1-EP-DR.2 C1.2 C2.2 C3.2 C4.2 C5.2 C6.2 C7.2 C8.2 C9.2 C10.2 C11.2 C12.2 C13.2 C14.2 C15.2 C16.2 C17.1 C18.1 C19.2 C20.2 C21.2 C22.2 C23.1 C24.1 C25.1 C27.2 C29.2 C30.2 C31.2 C32.2 C33.1 C34.2 C37.2 C38.2 C39.2 C42.2 C43.2 D3\.2 D4.1 EPD_C1.1 EPD_C2.1 EPD_C5.1 EPD_C6.1 EPD_C7.1 EPD_C8.1 EPD_C9.1 EPD_C10.1 EPD_C11.1 EPD_C12.1 IC1.D2 IC2.B1 IC2.B3 IC3.8 IC3.9 IC9.B1 IC9.C1 IC9.C2 IC9.C3 J1.8 J1.17 J1.MP1 J1.MP2 J2.3 J2.5 J4.A1_B12 J4.A12_B1 J4.SH1 J4.SH2 J4.SH3 J4.SH4 R1_TYPE_SEL.1 R1_USB.1 R2_EP_DR.1 R2_USB.2 R3.1 R9.1 SJ1.1 SW_DN.1 SW_ENT.1 SW_UP.1 TP_BAT_GND.TP TP_GND.TP U3.1 U3.4 U3.6 U3.9 U$1.P$74 U$1.P$75 U$1.P$76 U$1.P$77 U$1.P$78 U$1.P$79 U$1.P$80 U$1.P$81 U$1.P$82 U$1.P$83 U$1.P$84 U$1.P$85 U$1.P$86 U$1.P$87 U$1.P$88 U$1.P$89 U$1.P$90 U$1.P$B7 U$1.P$F23 X1.2 X1.4
HAPTIC_EN: IC2.A1 U$1.P$U1
IMU_INT1: IC3.5 U$1.P$N1
IMU_INT2: IC3.6 U$1.P$P2
LX1: IC9.B2 IC9.B3 L7.1
LX2: IC9.D2 IC9.D3 L7.2
MOSI: J1.14 U$1.P$B13
N$1: L2.1 U$1.P$B3
N$2: L2.2 L3.1
N$3: C13.1 U$1.P$A18
N$5: C20.1 U$1.P$AC5
N$8: C9.1 U$1.P$N24
N$9: C3.1 L1.1 U$1.P$H23
N$10: ANT1.1 C4.1 C22.1 L1.2
N$11: C1.1 U$1.P$B24 X1.1
N$13: C2.1 U$1.P$A23 X1.3
N$14: IC1.D1 R9.2
N$18: IC9.D1 R4.2
N$19: IC9.E1 R2.2
N$20: R17.1 R18.1
N$23: R1_EP_DR.1 R1_TYPE_SEL.2 SJ1.2
N$24: C32.1 IC2.A2
N$26: C2-EP-DR.1 D2.1 D4.2
N$27: C2-EP-DR.2 D5.1 L5.1 Q3.3
N$28: IC3.1 R3.2
N$34: EPD_C6.2 J1.18
N$35: EPD_C7.2 J1.19
N$36: EPD_C2.2 J1.4
N$37: EPD_C1.2 J1.5
N$39: EPD_C8.2 J1.20
N$41: EPD_C10.2 J1.22
N$44: EPD_C12.2 J1.24
N$45: J4.B5 R2_USB.1
N$49: J4.A5 R1_USB.2
OUT+: IC2.A3 TP_OP.TP
OUT-: IC2.C3 TP_ON.TP
P0.00/XL1: C17.2 U$1.P$D2 X2.1
P0.01/XL2: C18.2 U$1.P$F2 X2.2
P0.04: U$1.P$J1
P0.09: U$1.P$L24
P0.13: C30.1 R5.1 SW_UP.2 U$1.P$AD8
P0.14: C31.1 R8.1 SW_ENT.2 U$1.P$AC9
P0.19: U$1.P$AC15
P0.20: U$1.P$AD16
P0.21: U$1.P$AC17
P0.22: U$1.P$AD18
P0.23: U$1.P$AC19
P0.24: U$1.P$AD20
P0.25: U$1.P$AC21
P0.26: U$1.P$G1
P0.27: U$1.P$H2
P0.28: U$1.P$B11
P0.29: U$1.P$A10
P0.31: U$1.P$A8
P0.32: U$1.P$B9
P1.01: Q1.1 R_PWR_EPD.1 U$1.P$Y23
P1.02: C29.1 R7.1 SW_DN.2 U$1.P$W24
P1.03: U$1.P$V23
P1.04: U$1.P$U24
P1.05: U$1.P$T23
P1.06: U$1.P$R24
P1.07: U$1.P$P23
P1.09: U$1.P$R1
P1.10: U$1.P$A20
P1.11: U$1.P$B19
P1.12: U$1.P$B17
P1.13: U$1.P$A16
P1.14: U$1.P$B15
P1.15: U$1.P$A14
PMIC_INT: IC1.A1 U$1.P$T2
PREVGH: D5.2 EPD_C9.2 J1.21
PREVGL: D2.2 EPD_C11.2 J1.23
RESE: J1.3 Q3.2 R1_EP_DR.2
RESET: J2.6 TP_RESET.TP U$1.P$AC13
SCK: J1.13 U$1.P$A12
SCL: IC1.B1 IC2.C1 IC3.12 R4.1 R17.2 TP_SCL.TP U3.7 U$1.P$M2
SDA: IC1.C1 IC2.B2 IC3.2 R2.1 R18.2 TP_SDA.TP U3.8 U$1.P$L1
SWDCLK: J2.4 TP_SWDCLK.TP U$1.P$AA24
SWDIO: J2.2 TP_SWDIO.TP U$1.P$AC24
SWO: TP_SWO.TP U$1.P$AD22
VBAT [POWER]: C27.1 C37.1 IC1.C2 TP_VBAT.TP U3.2 U3.3
VBUS [POWER]: C21.1 C38.1 C42.1 C43.1 D3\.5 IC1.A2 J4.A4_B9 J4.A9_B4 U$1.P$AD2
VREG [POWER]: C23.2 C24.2 C39.1 IC1.B2 IC9.A1 IC9.A2 IC9.A3 TP_VREG.TP

## Tracks (layer width: path | path; a pad name or v marks a point on that pad's centre or on a via)
3V3  (via drill 0.35, 0.35 pad 0.25)  (23 unrouted)
  Top 0.152: IC2.C2 17.28,10.61 v17.25,10.63 | C34.1 17.79,13.4 v17.27,13.93 | R7.2 31.35,4.79 v31.35,4.26 | IC3.3 21.56,13.52 21.56,13.38 21.7,13.24 21.73,13.24 v22.08,12.9 | IC3.10 20.24,15.19 C19.1 20.05,15.82 v20.55,16.33 | IC3.7 v21.94,16.19 v21.95,16.2
  Top 0.305: IC9.E2 IC9.E3 4.68,8.47 v4.68,8.83 | C25.2 4.68,7.69 v4.68,8.83 | v4.68,8.83 4.87,9.02 C33.2 6.16,9.21 v7.6,9.21 | R5.2 13.8,5.55 v14.84,4.51 | v22.59,6.16 21.8,6.16 R8.2 21.55,5.91 v20.55,5.91 | C14.1 25.55,20.9 v26.65,20.9 | U$1.P$B1 28.02,20.27 v27.96,20.33 | v38.46,33.22 39.94,33.22 TP_3V3.TP 40.08,32.55 v38.97,31.44 | TP_3.3V.TP 35.61,33.72 v34.65,33.72 | J2.1 38.34,28.07 v38.34,28.69 | v32.87,21.91 33.38,22.42 C12.1 33.76,23.06 v33.26,23.56 | U$1.P$A22 33.43,20.3 33.43,20.38 33.26,20.55 v33.26,20.9 | Q1.2 42.29,10.86 v41.26,10.86 | R_PWR_EPD.2 40.26,11.75 v39.73,11.75 | v40.62,8.45 39.86,8.45 C8.1 | C7.1 35.1,9.66 35.37,9.66 35.44,9.59 v36.18,9.59 | C6.1 18.64,18.24 v18.14,18.74
  Route15 0.305: v18.14,18.74 19.16,18.74 19.29,18.61 19.29,17.72 20.94,16.07 22.21,16.07 22.21,15.39 22.16,15.34 22.16,12.97 v22.08,12.9
ALERT  (via drill 0.35)  (1 unrouted)
  Top 0.152: U$1.P$J24 35.02,17.21 v35.54,17.21 | v42.27,8.58 41.38,7.69 35.54,7.69 33.26,9.97 32.64,9.97 U3.5
D+  (via drill 0.35)  (1 unrouted)
  Top 0.152: D3\.4 21.32,23.31 v21.06,23.56
D-  (via drill 0.35)  (1 unrouted)
  Top 0.152: D3\.6 28.44,26.61 v28.56,26.61
DEC1
  Top 0.152: C5.1 21.37,20.84 23.07,20.84 24.71,19.21 U$1.P$C1
DEC3  (via drill 0.35)  (1 unrouted)
  Top 0.152: C11.1 v35.41,21.41
DEC4_6  (via drill 0.35)  (1 unrouted)
  Top 0.152: U$1.P$B5 29.27,20.31 27.93,21.65 C15.1 27.93,23.4 28.29,23.76 28.29,23.93 L3.2 | L3.2 28.94,23.56 C16.1 | L3.2 28.94,24.58 33.38,24.58 C10.1 35.68,22.56 35.68,22.73 35.81,22.86 36.28,22.86 36.38,22.77 v36.94,22.77
DN  (1 unrouted)
  Top 0.152: J4.A7 24.36,28.95 24.36,28.41 25.13,27.64 | 25.13,27.64 25.13,26.36 | J4.B7 25.24,28.32 25.23,28.31 25.23,27.75 25.13,27.64
DP  (2 unrouted)
  Top 0.152: J4.B6 23.74,26.88 23.22,26.36
EPD_3V3  (via drill 0.35)  (3 unrouted)
  Top 0.305: J1.16 J1.15 9.77,15.56 9.25,15.56 9.12,15.69 v9.12,15.82 | EPD_C5.2 14.14,19.05 v14.33,19.25 | v12.43,25.34 12.93,24.83 L5.2 C1-EP-DR.1 19.8,26.35 v19.79,26.36 | Q1.3 44.46,12.8 v44.69,13.02
EPD_BUSY  (via drill 0.35)  (1 unrouted)
  Top 0.152: J1.9 10.88,19.22 11.03,19.37 11.28,19.37 v11.41,19.5
EPD_CS  (via drill 0.35)  (1 unrouted)
  Top 0.152: J1.12 10.11,17.72 9.85,17.97 9.85,18.14 9.4,18.59 v9.4,18.63
EPD_DC  (via drill 0.35)  (1 unrouted)
  Top 0.152: J1.11 11.3,18.22 11.55,18.22 v12.05,17.72
EPD_RST  (via drill 0.35)  (1 unrouted)
  Top 0.152: J1.10 11.14,18.72 12.03,18.72 v12.05,18.74
GDR  (via drill 0.35)
  Top 0.152: Q3.1 9.91,30.99 R2_EP_DR.2 9.91,29.38 v10.39,28.9 | J1.2 10.95,22.72 11.52,23.29 v11.52,23.56
  Bottom 0.152: v11.52,23.56 11.52,27.77 v10.39,28.9
GND  (31 unrouted)
  pour Route2: 234 corners
  pour Top: 40.16,19.62 40.21,19.64 46.45,19.64 46.45,30.87 41.45,35.87 4.74,35.87 -0.26,30.87 -0.26,4.32 4.74,-0.68 42.72,-0.68 46.58,3.17 46.58,15.89 46.15,16.31 40.72,16.31 40.67,16.33 40.63,16.37 40.61,16.42 40.61,18.93 40.12,19.42 40.1,19.47 40.1,19.53 40.12,19.58
HAPTIC_EN
  Top 0.152: U$1.P$U1 26.01,13.7 23.48,13.7 23.09,13.31 23.09,12.13 22.97,12.13 22.23,11.4 19.44,11.4 IC2.A1
IMU_INT1
  Top 0.152: IC3.5 22.09,14.29 22.94,14.29 25.35,16.71 U$1.P$N1
IMU_INT2  (via drill 0.35)  (1 unrouted)
  Top 0.152: IC3.6 22.09,14.79 22.18,14.79 22.45,15.05 v22.84,15.05
LX1  (via drill 0.35)  (1 unrouted)
  Top 0.152: L7.1 13.75,7.11 v13.82,7.18 | IC9.B2 IC9.B3 5.49,6.34 5.41,6.34 5.11,6.04 v4.3,6.04
LX2  (via drill 0.35)  (1 unrouted)
  Top 0.152: L7.2 12.51,8.45 13.78,8.45 v13.82,8.41 | IC9.D2 IC9.D3 5.49,7.14 5.41,7.14 4.95,6.67 v3.16,6.67
MOSI  (via drill 0.35)  (2 unrouted)
  Top 0.152: J1.14 8.99,16.72 v8.87,16.83
  other vias: 31.48,21.02
N$1
  Top 0.152: L2.1 26.78,21.66 27.41,21.02 28.12,21.02 28.77,20.38 U$1.P$B3
N$2
  Top 0.152: L2.2 27.55,24.07 L3.1
N$3
  Top 0.152: C13.1 32.52,21.13 U$1.P$A18
N$5  (via drill 0.35)  (1 unrouted)
  Top 0.152: C20.1 18.52,15.7 v17.76,16.45
N$8
  Top 0.152: U$1.P$N24 35.19,16.71 35.29,16.61 37.42,16.61 C9.1
N$9
  Top 0.152: U$1.P$H23 34.16,18.1 C3.1 36.06,18.24 36.23,18.24 36.47,18.48 L1.1
N$10  (1 unrouted)
  Top 0.152: L1.2 37.7,18.61 C4.1 C22.1 40,18.47 40.17,18.47 40.41,18.23 41.51,18.23
N$11
  Top 0.152: U$1.P$B24 35.71,19.71 36.43,18.99 37.3,18.99 37.78,19.47 37.78,19.55 X1.1 38.37,20.13 C1.1
N$13
  Top 0.152: U$1.P$A23 35.84,20.21 X1.3 37.62,21.99 37.62,22.06 37.98,22.42 39.48,22.42 39.73,22.17 C2.1
N$14
  Top 0.152: IC1.D1 24.51,10.81 24.38,10.94 24.31,10.94 R9.2
N$18
  Top 0.152: IC9.D1 7.43,7.2 R4.2
N$19
  Top 0.152: IC9.E1 6.82,8.07 R2.2
N$20  (via drill 0.35)  (1 unrouted)
  Top 0.305: R18.1 2.65,3.48 v2.65,3.24 | v3.79,2.48 4.4,1.87 R17.1
N$23
  Top 0.152: R1_EP_DR.1 14.61,32.96 SJ1.2 17.15,32.96 R1_TYPE_SEL.2
N$24
  Top 0.152: C32.1 20.81,8.87 20.23,9.44 20.23,9.53 19.3,10.46 | 19.3,10.46 | 19.3,10.46 IC2.A2
N$26
  Top 0.152: D2.1 5.76,30.44 D4.2 8.05,32.72 C2-EP-DR.1
N$27  (1 unrouted)
  Top 0.152: Q3.3 9.16,33.12 8.57,33.72 7.28,33.72 C2-EP-DR.2 4.96,31.4 4.96,27.99 5.41,27.55 D5.1 6.42,26.32 7.22,27.12 12.55,27.12 14.33,28.9
N$28
  Top 0.152: IC3.1 19.95,13.64 R3.2
N$34
  Top 0.152: J1.18 10.55,14.84 10.87,14.84 12.99,16.96 EPD_C6.2
N$35
  Top 0.152: J1.19 10.55,14.34 10.87,14.34 12.22,15.69 EPD_C7.2
N$36
  Top 0.152: J1.4 13.82,21.72 EPD_C2.2
N$37
  Top 0.152: J1.5 13.84,21.22 EPD_C1.2
N$39
  Top 0.152: J1.20 13.44,13.72 EPD_C8.2
N$41
  Top 0.152: J1.22 13.3,12.72 EPD_C10.2
N$44
  Top 0.152: J1.24 11.76,11.72 EPD_C12.2
N$45
  Top 0.152: J4.B5 22.74,28.13 R2_USB.1
N$49
  Top 0.152: J4.A5 25.74,28.2 R1_USB.2
OUT+
  Top 0.152: TP_OP.TP 19.32,9.94 IC2.A3
OUT-
  Top 0.152: TP_ON.TP 18.15,3.49 IC2.C3
P0.00/XL1
  Top 0.152: C17.2 21.8,20.39 X2.1 23.31,18.88 28.16,18.88 28.24,18.96 U$1.P$D2
P0.01/XL2
  Top 0.152: C18.2 20.66,17.61 X2.2 23,18.54 28.16,18.54 28.24,18.46 U$1.P$F2
P0.13  (via drill 0.35)  (1 unrouted)
  Top 0.152: SW_UP.2 10.65,5.19 R5.1 11.21,5.75 11.21,5.82 11.34,5.95 15.82,5.95 C30.1 17.24,5.79 v17.38,5.66
P0.14  (via drill 0.35 pad 0.25)  (1 unrouted)
  Top 0.152: SW_ENT.2 21.57,4.27 R8.1 24.57,5.38 C31.1 24.61,5.37 25.18,5.95 25.18,6.48 v26.27,7.56
P1.01  (via drill 0.35)  (1 unrouted)
  Top 0.152: Q1.1 42.06,12.54 R_PWR_EPD.1 38.48,12.54 v38.46,12.52
P1.02  (via drill 0.35)  (2 unrouted)
  Top 0.152: U$1.P$W24 35.67,15.21 36.42,14.47 | SW_DN.2 32.62,5.51 R7.1 33.05,5.94 34.4,5.94 34.99,6.54 C29.1 37.32,5.52 v37.32,4.51
  other vias: 36.43,14.42
PMIC_INT  (via drill 0.35)  (1 unrouted)
  Top 0.152: IC1.A1 27.04,11.24 27.16,11.24 v27.67,11.75
PREVGH  (via drill 0.35)  (1 unrouted)
  Top 0.152: v8.49,25.85 6.24,25.85 6.08,25.69 2.54,25.69 D5.2 | EPD_C9.2 14.07,13.22 J1.21 10.31,13.34 9.98,13.34 9.85,13.47 9.85,13.57 9.12,14.29 v9.12,14.67
PREVGL
  Top 0.152: D2.2 0.87,27.09 0.87,25.09 1.12,24.83 7.93,24.83 8.51,24.25 8.51,21.22 8.26,20.98 8.26,14.06 9.98,12.34 10.31,12.34 J1.23 12.53,12.22 EPD_C11.2
RESE  (via drill 0.35)
  Top 0.152: Q3.2 11.01,30.86 R1_EP_DR.2 11.01,29.81 11.86,28.95 v12.05,28.95 | J1.3 11.54,22.22 12.38,23.06 12.38,23.26 12.66,23.26 v12.68,23.24
  Bottom 0.152: v12.68,23.24 12.68,24.74 13.03,25.09 13.03,27.97 v12.05,28.95
RESET  (via drill 0.35)  (3 unrouted)
  Top 0.152: TP_RESET.TP 31.35,30.48 34.51,27.32 35.27,27.32 J2.6 35.66,26.03 35.66,25.77 34.78,24.89 v34.78,24.83 | v39.86,15.69 39.83,15.66 v36.56,15.66 | v34.91,12.39 v36.94,12.39
SCK  (via drill 0.35)  (1 unrouted)
  Top 0.152: J1.13 9.52,17.22 v9,17.74 | U$1.P$A12 30.33,20.9 v30.33,21.41
SCL  (via drill 0.35)  (4 unrouted)
  Top 0.152: 17.15,11.65 17.84,10.96 18,10.96 IC2.C1 18.15,11.41 18.04,11.51 18.04,12.16 18.21,12.33 v18.21,12.5 | 17.15,11.65 17,11.81 17,12.13 v17.13,12.26 | R17.2 7.14,1.72 TP_SCL.TP 8.08,2.66 8.08,6.16 8,6.24 R4.1 9.84,7.18 10.6,7.94 12.99,7.94 13.12,7.8 15.15,7.8 16.65,9.3 16.65,11.15 17.15,11.65 | IC1.B1 26.14,10.88 26.14,10.98 26.03,11.08 v26.03,11.51 | U3.7 30.6,8.94 30.6,9.26 31.22,9.88 v31.22,10.36 | IC3.12 20.29,14.05 19.67,14.05 | 19.67,14.05 19.29,13.67 v19.29,12.52 | 19.67,14.05 19.67,15.09 19.17,15.58 19.17,17.53 19.79,18.15 19.79,18.74 20.05,18.99 v20.3,18.99
SDA  (via drill 0 pad 0.1, 0.35)  (6 unrouted)
  Top 0.152: TP_SDA.TP 2.16,9.85 v3.54,9.85 | v8.87,8.96 8.51,8.6 R2.1 9.76,8.07 10.27,8.58 10.27,9.59 v9.76,10.1 | IC1.C1 25.74,10.88 25.74,10.95 25.19,11.49 23.84,11.49 23.59,11.24 v23.09,11.24 | U3.8 29.96,10.24 v30.08,10.36 | IC3.2 20.82,13.52 20.82,13.28 20.05,12.51 20.05,12.13 | 20.05,12.13 21.32,12.13 v21.44,12.01 | 20.05,12.13 20.12,12.06 v20.19,12.06 | v23.73,16.2 24.62,17.09 27.9,17.09 U$1.P$L1
  Top 0.305: TP_SDA.TP 1.46,7.77 v1,7.31 | R18.2 v2.14,5.53
  Bottom 0.152: v9.76,10.1 16.93,10.1 17,10.03 18.07,10.03 IC2.B2 18.65,11.77
  other vias: 18.65,10.61
SWDCLK  (via drill 0.35)  (2 unrouted)
  Top 0.152: TP_SWDCLK.TP 44.69,28.42 v44.69,28.01 | J2.4 38.32,25.55 v38.34,25.55 | U$1.P$AA24 34.61,14.8 34.65,14.8 35.92,13.53 39.1,13.53 v39.99,14.42
SWDIO  (via drill 0.35)  (1 unrouted)
  Top 0.152: J2.2 39.05,26.08 40.55,26.08 42.05,24.58 TP_SWDIO.TP 44.81,23.68 v44.81,22.93 | v41.89,15.05 41.89,14.58 40.53,13.23 35.51,13.23 U$1.P$AC24
SWO
  Top 0.152: TP_SWO.TP 35.16,10.61 33.52,12.25 U$1.P$AD22
VBAT  (via drill 0.35)  (2 unrouted)
  Top 0.152: v29.83,5.15 30.46,5.78 C27.1
  Top 0.305: C37.1 23.77,9.59 v25.25,9.59 25.81,10.15 IC1.C2 | U3.3 U3.2 30.41,6.77 30.41,6.34 29.83,5.77 v29.83,5.15 | TP_VBAT.TP 33.13,7.93 v33.13,8.58
VBUS  (via drill 0.35)  (8 unrouted)
  Top 0.305: IC1.A2 26.68,10.48 v27.29,10.48 | C38.1 28.81,11.37 v29.32,11.88 | 27.02,29.52 25.98,30.55 23.06,30.55 22.29,29.78 22.29,29.27 J4.A9_B4 21.9,28.88 21.9,28.37 21.41,27.88 v20.43,27.88 | D3\.5 24.19,22.37 v23.73,21.91 | C43.1 v40.24,6.8 | v41.38,6.04 42.14,6.8 C42.1 | C21.1 25.09,12.9 v25.89,12.9
VREG  (via drill 0.35)  (1 unrouted)
  Top 0.152: C24.2 6.42,4.63 C23.2
  Top 0.305: 5.58,4.63 C24.2 5.55,4.74 IC9.A3 IC9.A2 IC9.A1 7.51,6 7.51,5.95 v7.47,5.91 | v21.19,7.56 21.44,7.82 TP_VREG.TP 24.23,8.82 C39.1 27.29,9.33 26.91,9.33 26.21,10.04 IC1.B2